# EAGLE board circuito_tesi (EAGLE 9.6.2)
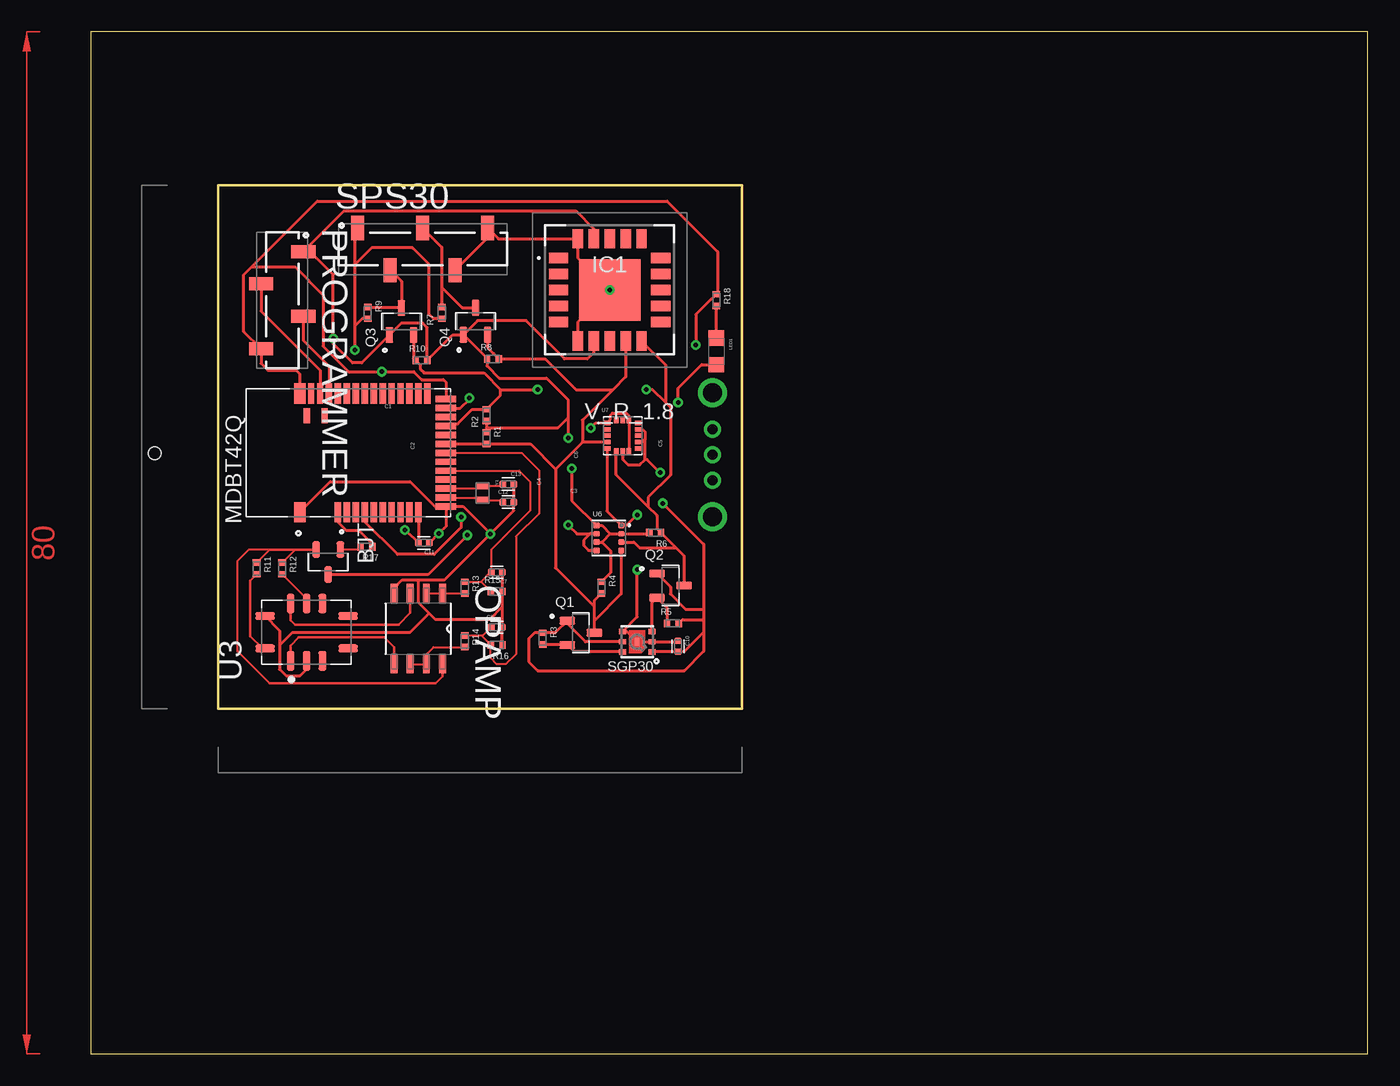
[diagram p0: board, top side]
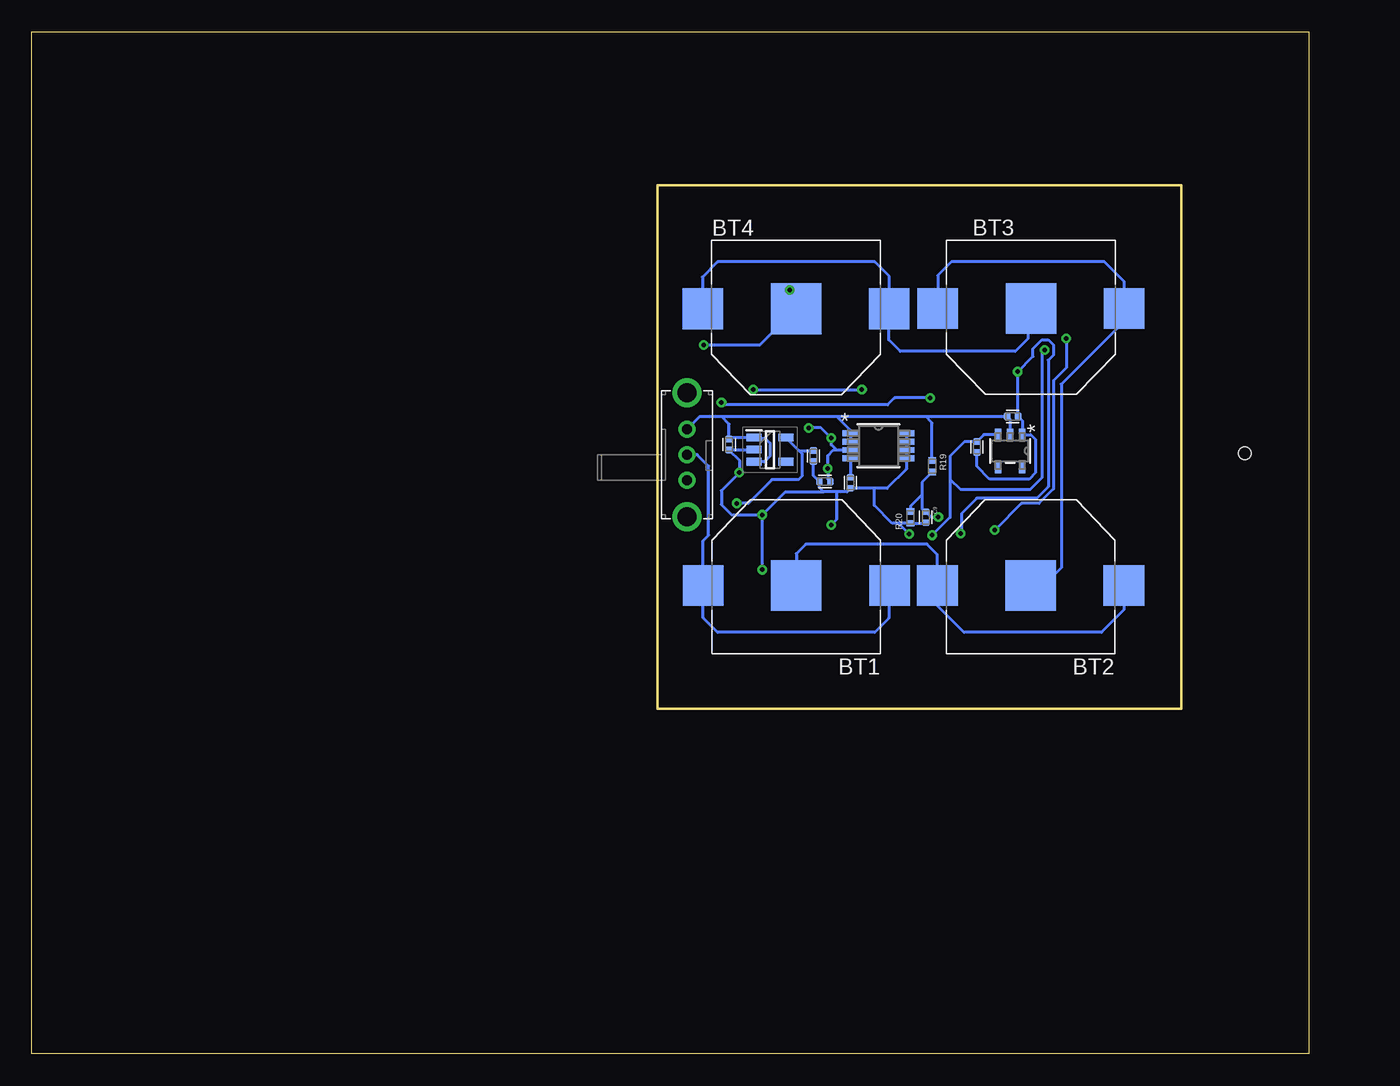
[diagram p1: board, bottom side, seen from below]

Size 100 x 80 mm. Coordinates in mm from the lower left corner, seen from the top.
Outline: 0,0 100,0 100,80 0,80 0,0
Outline: 10,68 10,27 51,27 51,68 10,68
Copper layers (1*16): Top 0.035mm / dielectric 1.5mm / Bottom 0.035mm
Design rules "default": minimum track width 6mil, minimum drill 0.35mm, track to track 6mil, track to pad 6mil, pad to pad 6mil, via to via 6mil, smd to smd 6mil, copper to edge 40mil, drill to drill 6mil, minimum pad ring 10mil, minimum via ring 8mil, stop-mask expansion 4mil, vias tented up to drill 0mil, thermal gap 10mil
Holes 1 mm at 5,47

## Footprints (pad centres in the part's own frame; a part is rotated, then mirrored left to right if it is on the bottom)
SOT95P230X110-3N = smd 1.26 x 0.59: 1 -0.98,0.95; 2 -0.98,-0.95; 3 0.98,0
BAT_2996TR = smd 3.96 x 3.96: - 0,0 | smd 3.18 x 3.18: S+1 -7.3,0; S+2 7.3,0
CAPC1005X55N = smd 0.54 x 0.6: 1 -0.43,0; 2 0.43,0
SCD41DR2 = smd 1.5 x 0.8: 1 -4,2.5; 2 -4,1.25; 3 -4,0; 4 -4,-1.25; 5 -4,-2.5; 11 4,-2.5; 12 4,-1.25; 13 4,0; 14 4,1.25; 15 4,2.5 | smd 0.8 x 1.5: 6 -2.5,-4; 7 -1.25,-4; 8 0,-4; 9 1.25,-4; 10 2.5,-4; 16 2.5,4; 17 1.25,4; 18 0,4; 19 -1.25,4; 20 -2.5,4 | smd 4.8 x 4.8: 21 0,0
DIOC200X125X110 = smd 1.2 x 1.2: + 1.05,0; - -1.05,0
XCVR_317030213 = smd 1.6 x 0.9: 1 -4.65,3.8; 39 4.65,3.8 | smd 1.6 x 0.5: 2 -4.65,0.8; 3 -4.65,0.1; 4 -4.65,-0.6; 5 -4.65,-1.3; 6 -4.65,-2; 7 -4.65,-2.7; 8 -4.65,-3.4; 9 -4.65,-4.1; 10 -4.65,-4.8; 11 -4.65,-5.5; 25 4.65,-6.2; 26 4.65,-5.5; 27 4.65,-4.8; 28 4.65,-4.1; 29 4.65,-3.4; 30 4.65,-2.7; 31 4.65,-2; 32 4.65,-1.3; 33 4.65,-0.6; 34 4.65,0.1; 35 4.65,0.8; 36 4.65,1.5; 37 4.65,2.2; 38 4.65,2.9 | smd 0.5 x 1.6: 12 -4.2,-7.65; 13 -3.5,-7.65; 14 -2.8,-7.65; 15 -2.1,-7.65; 16 -1.4,-7.65; 17 -0.7,-7.65; 18 0,-7.65; 19 0.7,-7.65; 20 1.4,-7.65; 21 2.1,-7.65; 22 2.8,-7.65; 23 3.5,-7.65; 24 4.2,-7.65 | smd 1.2 x 0.5: 40 2.9,3.25; 41 2.9,1.85
SOIC127P600X175-8N = smd 1.422 x 0.533: 1 -2.794,1.905; 2 -2.794,0.635; 3 -2.794,-0.635; 4 -2.794,-1.905; 5 2.794,-1.905; 6 2.794,-0.635; 7 2.794,0.635; 8 2.794,1.905
GCT_BG306-04-A-1-0400-X-X_REVD = smd 1.02 x 1.9: 1 -3.81,1.65; 2 -1.27,-1.65; 3 1.27,1.65; 4 3.81,-1.65
SOT95P240X111-3N = smd 1.23 x 0.6: 1 -1.06,0.95; 2 -1.06,-0.95; 3 1.06,0
RESC1005X35N = smd 0.49 x 0.6: 1 -0.457,0; 2 0.457,0
SW_EG1213 = drill 0.8: 1 -2,0; 2 0,0; 3 2,0 | drill 1.5: P$4 -4.85,0; P$5 4.85,0
SGP30 = smd 0.55 x 0.4: 1 -1.15,0.8; 2 -1.15,0; 3 -1.15,-0.8; 4 1.15,-0.8; 5 1.15,0; 6 1.15,0.8 | smd 0.305 x 0.61: DIEPAD 0,0
GCT_BG306-05-A-1-0400-X-X_REVD = smd 1.02 x 1.9: 1 -5.08,1.65; 2 -2.54,-1.65; 3 0,1.65; 4 2.54,-1.65; 5 5.08,1.65
SENSOR_MICS-6814 = smd 1.5 x 0.6: A -2.25,1.25; B -2.25,0; C -2.25,-1.25; F 2.25,-1.25; G 2.25,0; H 2.25,1.25 | smd 0.6 x 1.5: D -1.27,-3.25; E 1.27,-3.25; J 1.27,3.25; K -1.27,3.25
PSON65P250X250X100-8N = smd 0.49 x 0.45: 1 0.97,0.975; 2 0.97,0.325; 3 0.97,-0.325; 4 0.97,-0.975; 5 -0.97,-0.975; 6 -0.97,-0.325; 7 -0.97,0.325; 8 -0.97,0.975
PQFN50P300X300X100-16N = smd 0.52 x 0.35: 1 -1.225,1; 2 -1.225,0.5; 3 -1.225,0; 4 -1.225,-0.5; 5 -1.225,-1; 9 1.225,-1; 10 1.225,-0.5; 11 1.225,0; 12 1.225,0.5; 13 1.225,1 | smd 0.35 x 0.52: 6 -0.5,-1.225; 7 0,-1.225; 8 0.5,-1.225; 14 0.5,1.225; 15 0,1.225; 16 -0.5,1.225
SOT95P275X130-5N = smd 1.2 x 0.6: 1 -1.25,0.95; 2 -1.25,0; 3 -1.25,-0.95; 4 1.25,-0.95; 5 1.25,0.95
MSOP-8LD-PL-1_MCH = smd 1.257 x 0.457: 1 -2.178,0.975; 2 -2.178,0.325; 3 -2.178,-0.325; 4 -2.178,-0.975; 5 2.178,-0.975; 6 2.178,-0.325; 7 2.178,0.325; 8 2.178,0.975
TSOT23-5_ONS = smd 0.953 x 0.508: 1 -1.276,0.95; 2 -1.276,0; 3 -1.276,-0.95; 4 1.276,-0.95; 5 1.276,0.95
XTAL_ECS-.327-9-16-TR = smd 0.5 x 1: 1 -0.55,0; 2 0.55,0

## Placement (x,y rotation side)
BJT  MMBT3904-215  [SOT95P230X110-3N]  18.6,38.5 270 top
BT1  2996TR  [BAT_2996TR]  40.14,36.65 180 bottom
BT2  2996TR  [BAT_2996TR]  21.79,36.65 180 bottom
BT3  2996TR  [BAT_2996TR]  21.76,58.35 0 bottom
BT4  2996TR  [BAT_2996TR]  40.16,58.33 0 bottom
C1  C0402H102J5GACTU  [CAPC1005X55N]  23.2,49.9 0 bottom
C2  C0402H102J5GACTU  [CAPC1005X55N]  26,47.5 270 bottom
C3  C0402H102J5GACTU  [CAPC1005X55N]  37.9,44.8 180 bottom
C4  C0402H102J5GACTU  [CAPC1005X55N]  35.9,44.7 270 bottom
C5  C0402H102J5GACTU  [CAPC1005X55N]  45.4,47.7 270 bottom
C6  C0402H102J5GACTU  [CAPC1005X55N]  38.8,46.8 270 bottom
C7  C0402H102J5GACTU  [CAPC1005X55N]  31.8,37.7 180 top
C8  C0402H102J5GACTU  [CAPC1005X55N]  31.8,33.4 0 top
C9  C0402H102J5GACTU  [CAPC1005X55N]  30,42 270 bottom
C10  C0402H102J5GACTU  [CAPC1005X55N]  46,31.9 270 top
C11  C0402H102J5GACTU  [CAPC1005X55N]  26.1,40 180 top
C12  C0402H102J5GACTU  [CAPC1005X55N]  32.7,43.2 0 top
C13  C0402H102J5GACTU  [CAPC1005X55N]  32.7,44.6 0 top
IC1  SCD41-D-R2  [SCD41DR2]  40.65,59.8 0 top
LED1  LTST-C170TBKT  [DIOC200X125X110]  49,55 270 top
MDBT42Q  317030213  [XCVR_317030213]  20.17,47.05 90 top
OPAMP  TSV912IDT  [SOIC127P600X175-8N]  25.66,33.28 270 top
PROGRAMMER  BG306-04-A-1-0400-X-X_REVD  [GCT_BG306-04-A-1-0400-X-X_REVD]  15,59 270 top
Q1  BSS138  [SOT95P240X111-3N]  38.39,32.96 0 top
Q2  BSS138  [SOT95P240X111-3N]  45.41,36.66 0 top
Q3  BSS138  [SOT95P240X111-3N]  24.34,57.33 90 top
Q4  BSS138  [SOT95P240X111-3N]  30.14,57.35 90 top
R1  8-1879333-9  [RESC1005X35N]  31,48.2 270 top
R2  8-1879333-9  [RESC1005X35N]  31,50 90 top
R3  8-1879333-9  [RESC1005X35N]  35.4,32.5 270 top
R4  8-1879333-9  [RESC1005X35N]  40,36.5 270 top
R5  8-1879333-9  [RESC1005X35N]  45.6,33.7 0 top
R6  8-1879333-9  [RESC1005X35N]  44.2,40.8 180 top
R7  8-1879333-9  [RESC1005X35N]  27.5,58 90 top
R8  8-1879333-9  [RESC1005X35N]  31.5,54.4 0 top
R9  8-1879333-9  [RESC1005X35N]  21.7,58 270 top
R10  8-1879333-9  [RESC1005X35N]  25.9,54.3 0 top
R11  8-1879333-9  [RESC1005X35N]  13,38 270 top
R12  8-1879333-9  [RESC1005X35N]  15,38 270 top
R13  8-1879333-9  [RESC1005X35N]  29.3,36.5 270 top
R14  8-1879333-9  [RESC1005X35N]  29.3,32.3 270 top
R15  8-1879333-9  [RESC1005X35N]  31.8,36.2 0 top
R16  8-1879333-9  [RESC1005X35N]  31.8,32 180 top
R17  8-1879333-9  [RESC1005X35N]  21.6,39.7 180 top
R18  8-1879333-9  [RESC1005X35N]  49,59 270 top
R19  8-1879333-9  [RESC1005X35N]  29.5,46 270 bottom
R20  8-1879333-9  [RESC1005X35N]  31.2,42 90 bottom
S1  EG1213  [SW_EG1213]  48.7,46.9 270 bottom
SGP30  SGP30  [SGP30]  42.8,32.26 180 top
SPS30  BG306-05-A-1-0400-X-X_REVD  [GCT_BG306-05-A-1-0400-X-X_REVD]  26,63 0 top
U3  MICS-6814  [SENSOR_MICS-6814]  16.91,33.01 90 top
U6  BME280  [PSON65P250X250X100-8N]  40.58,40.39 0 top
U7  LIS3DH  [PQFN50P300X300X100-16N]  41.66,48.39 0 top
V_R_1.8  S-1318D18-M5T1U4  [SOT95P275X130-5N]  42.2,47.3 0 bottom
V_R_3.3  MIC5219-3.3YMMMSOP-8LD-PL-1_MCH  [MSOP-8LD-PL-1_MCH]  33.7,47.6 0 bottom
V_R_5  MC78LC50NTRGTSOT23-5_ONS  [TSOT23-5_ONS]  23.4,47.2 270 bottom
Y1  ECS-.327-9-16-TR  [XTAL_ECS-.327-9-16-TR]  30.7,43.9 270 top

## Library data of the parts
BJT = BJT_TO-236; DESCRIPTION: Bipolar (BJT) Transistor NPN 40 V 200 mA 300MHz 250 mW Surface Mount TO-236AB; DIGI-KEY_PART_NUMBER: 1727-4044-2-ND; MF: Nexperia USA; MP: MMBT3904,215; PACKAGE: SOT23-3 Nexperia USA Inc.; PURCHASE-URL: https://pricing.snapeda.com/search/part/MMBT3904,215/?ref=eda
BT1-BT4 = Battery_holder; DESCRIPTION: SMT Holder for 11.6mm Cell-Tin Nickel Plated on T&R; DIGI-KEY_PART_NUMBER: 36-2996TR-ND; MF: Keystone Electronics; MP: 2996TR; PACKAGE: None; PURCHASE-URL: https://pricing.snapeda.com/search/part/2996TR/?ref=eda
C1-C13 = Condensatore_case_0402; AVAILABILITY: Not in stock; DESCRIPTION: CAPACITOR, NP0, 0402, 50V, 1NF; Capacitance:1000pF; Capacitance Tolerance:± 5%; Dielectric Characteristic:C0G / NP0; Voltage Rating:50V; Capacitor Case Style:0402; Operating Temperature Range:-55°C to +200°C; SVHC:No SVHC (19-Dec-2011); Capacitor Mounting:SMD; MF: KEMET; MP: C0402H102J5GACTU; PACKAGE: 0402 KEMET; PRICE: None
IC1 = SCD41-R2_unofficial; ARROW_PART_NUMBER: SCD41-D-R2; ARROW_PRICE-STOCK: https://www.arrow.com/en/products/scd41-d-r2/sensirion-ag?region=nac; DESCRIPTION: Air Quality Sensor CO2 Sensor 2.5V/3.3V/5V 20-Pin SMD EP; HEIGHT: 6.8mm; MANUFACTURER_NAME: Sensirion; MANUFACTURER_PART_NUMBER: SCD41-D-R2; MOUSER_PART_NUMBER: 403-SCD41-D-R2; MOUSER_PRICE-STOCK: https://www.mouser.co.uk/ProductDetail/Sensirion/SCD41-D-R2?qs=HBWAp0VN4Ri4o7ei4T3s0g%3D%3D
LED1 = LED_0805; DESCRIPTION: LED Low-Power Uni-Color Blue 468nm 2-Pin Chip LED T/R; MF: Lite-On Electronics; MP: LTST-C170TBKT; PACKAGE: None; PURCHASE-URL: https://pricing.snapeda.com/search/part/LTST-C170TBKT/?ref=eda
MDBT42Q = Raytac_nRF52; DESCRIPTION: Bluetooth Bluetooth v4.2 Transceiver Module 2.4GHz Integrated, Chip Surface Mount; DIGI-KEY_PART_NUMBER: 1597-1434-ND; MF: Seeed Technology; MP: 317030213; PACKAGE: SMD-41 Seeed Studio; PURCHASE-URL: https://pricing.snapeda.com/search/part/317030213/?ref=eda
OPAMP = Opamp_SMD; AVAILABILITY: In Stock; DESCRIPTION: General Purpose Amplifier 2 Circuit Rail-to-Rail 8-SOIC; MF: STMicroelectronics; MP: TSV912IDT; PACKAGE: SOIC-8 STMicroelectronics; PRICE: None; PURCHASE-URL: https://pricing.snapeda.com/search/part/TSV912IDT/?ref=eda
PROGRAMMER = Connet_6_BG306-04-A-1-0400-X-X_REVD; DESCRIPTION: 4 Position Receptacle Connector 0.100 (2.54mm) Surface Mount Gold; DIGI-KEY_PART_NUMBER: 2073-BG306-04-A-1-0400-L-BTR-ND; MF: Global Connector Technology; MP: BG306-04-A-1-0400-L-B; PACKAGE: None; PURCHASE-URL: https://pricing.snapeda.com/search/part/BG306-04-A-1-0400-L-B/?ref=eda
Q1-Q4 = BSS138; DESCRIPTION: N-Channel 50 V 200mA (Ta) 225mW (Ta) Surface Mount SOT-23-3 (TO-236); DIGI-KEY_PART_NUMBER: BSS138TR-ND; MF: ON Semiconductor; MP: BSS138; PACKAGE: SOT-23 ON; PURCHASE-URL: https://pricing.snapeda.com/search/part/BSS138/?ref=eda
R1-R20 = Resistenza_case_0402; AVAILABILITY: In Stock; COMMENT: 8-1879333-9; DESCRIPTION: Precision Thin Film Smnt Resistor 0402 Case 160kOhm +/-0.1%.063W +/-25ppm/C; MF: TE Connectivity; MP: 8-1879333-9; PACKAGE: None; PRICE: None; PURCHASE-URL: https://pricing.snapeda.com/search/part/8-1879333-9/?ref=eda
S1 = switch_TH_HO; DESCRIPTION: Slide Switch SPDT Through Hole, Right Angle; DIGI-KEY_PART_NUMBER: EG1906-ND; MF: E-Switch; MP: EG1213; PACKAGE: None; PURCHASE-URL: https://pricing.snapeda.com/search/part/EG1213/?ref=eda
SGP30 = SGP30; AVAILABILITY: In Stock; DESCRIPTION: SGP30, SHTC1 Air Quality, Humidity, Temperature Sensor Arduino Platform Evaluation Expansion Board; MF: Sensirion AG; MP: SGP30; PACKAGE: None; PRICE: None; PURCHASE-URL: https://pricing.snapeda.com/search/part/SGP30/?ref=eda
SPS30 = Connet_5_BG306-05-A-1-0400-X-X_REVD; DESCRIPTION: 5 Position Receptacle Connector 0.100 (2.54mm) Surface Mount Gold; DIGI-KEY_PART_NUMBER: 2073-BG306-05-A-1-0400-L-BTR-ND; MF: Global Connector Technology; MP: BG306-05-A-1-0400-L-B; PACKAGE: None; PURCHASE-URL: https://pricing.snapeda.com/search/part/BG306-05-A-1-0400-L-B/?ref=eda
U3 = MICS-6814; AVAILABILITY: Not in stock; DESCRIPTION: MiCS-6814 Air Quality Sensor mikroBUS™ Click™ Platform Evaluation Expansion Board; MF: MikroElektronika; MP: MICS-6814; PACKAGE: None; PRICE: None
U6 = BME280; AVAILABILITY: In Stock; DESCRIPTION: Board Mount Humidity Sensors MEMS humidity, pressure and temperature sensor; MF: Bosch; MP: BME280; PACKAGE: LGA-8 Bosch; PRICE: None; PURCHASE-URL: https://pricing.snapeda.com/search/part/BME280/?ref=eda
U7 = LIS3DH; DESCRIPTION: Accelerometer X, Y, Z Axis ±2g, 4g, 8g, 16g 0.5Hz ~ 625Hz 16-LGA (3x3); DIGI-KEY_PART_NUMBER: 497-10610-ND; MF: STMicroelectronics; MP: LIS3DH; PACKAGE: LGA-16 STMicroelectronics; PURCHASE-URL: https://pricing.snapeda.com/search/part/LIS3DH/?ref=eda
V_R_1.8 = VOLT_REG_1.8_SOT-23-5; DESCRIPTION: IC REG LINEAR 1.8V 100MA SOT23-5; HEIGHT: 1.3mm; MANUFACTURER_NAME: ABLIC Inc.; MANUFACTURER_PART_NUMBER: S-1318D18-M5T1U4; MOUSER_PART_NUMBER: 628-S-1318D18-M5T1U4; MOUSER_PRICE-STOCK: https://www.mouser.co.uk/ProductDetail/ABLIC/S-1318D18-M5T1U4/?qs=bZr6mbWTK5mVILZBDijY2w%3D%3D
V_R_3.3 = Volt_Reg_3.3_8MSOP; COPYRIGHT: Copyright (C) 2022 Ultra Librarian. All rights reserved.; DIGI-KEY_PART_NUMBER_1: 576-1827-5-ND; MANUFACTURER_PART_NUMBER: MIC5219-3.3YMM; MFR_NAME: Microchip
V_R_5 = VOLT_REG_5V_SOT-23-5; COPYRIGHT: Copyright (C) 2022 Ultra Librarian. All rights reserved.; DIGI-KEY_PART_NUMBER_1: 2156-MC78LC50NTRG-OS-ND; DIGI-KEY_PART_NUMBER_2: =MC78LC50NTRG; DIGI-KEY_PART_NUMBER_3: MC78LC50NTRGOSCT-ND; DIGI-KEY_PART_NUMBER_4: MC78LC50NTRGOSDKR-ND; DIGI-KEY_PART_NUMBER_5: MC78LC50NTRGOSTR-ND; MANUFACTURER_PART_NUMBER: MC78LC50NTRG; MFR_NAME: onsemi
Y1 = Crystal-ECS-.327-9-16-TR; DESCRIPTION: 32.768 kHz ±20ppm Crystal 9pF 90 kOhms 2-SMD, No Lead; DIGI-KEY_PART_NUMBER: XC2132TR-ND; MF: ECS Inc.; MP: ECS-.327-9-16-TR; PACKAGE: SMD-2 ECS International; PURCHASE-URL: https://pricing.snapeda.com/search/part/ECS-.327-9-16-TR/?ref=eda

## Nets
1.8V: C6.1 C10.2 Q1.1 Q2.1 R3.1 R5.2 SGP30.1 SGP30.5 V_R_1.8.5
3.3V: C3.1 C11.2 IC1.7 IC1.19 MDBT42Q.11 PROGRAMMER.1 Q3.1 Q4.1 R1.1 R2.1 R4.1 R6.2 R8.1 R10.2 U6.2 U6.6 U6.8 U7.1 U7.8 U7.14 V_R_3.3.3
5V: BJT.3 C2.1 R7.1 R9.2 SPS30.1 V_R_5.3
AIN1: C7.2 MDBT42Q.16 R13.1 R15.1
AIN3: C8.1 MDBT42Q.18 R14.1 R16.2
AIN4: C9.1 MDBT42Q.5 R19.2 R20.2
BJT: BJT.2 OPAMP.8 R11.1 R12.1
DCC: MDBT42Q.10
DEC4: MDBT42Q.9
GND: BT4.- C1.2 C2.2 C3.2 C4.2 C5.2 C6.2 C7.1 C8.2 C9.2 C10.1 C11.1 C12.2 C13.2 IC1.6 IC1.20 IC1.21 MDBT42Q.1 MDBT42Q.12 MDBT42Q.24 MDBT42Q.39 OPAMP.4 PROGRAMMER.4 R15.2 R16.1 R18.1 R20.1 SGP30.2 SGP30.4 SGP30.DIEPAD SPS30.4 SPS30.5 U3.B U3.J U6.1 U6.5 U6.7 U7.5 U7.7 U7.10 U7.12 V_R_1.8.2 V_R_3.3.5 V_R_3.3.6 V_R_3.3.7 V_R_3.3.8 V_R_5.1
LED: LED1.+ MDBT42Q.23
N$2: BT1.- BT2.S+1 BT2.S+2
N$4: BT2.- BT3.S+1 BT3.S+2
N$6: OPAMP.5 U3.A
N$7: OPAMP.6 OPAMP.7 R14.2
N$8: OPAMP.1 OPAMP.2 R13.2
N$9: LED1.- R18.2
N$10: OPAMP.3 U3.H
N$11: R12.2 U3.G
N$13: R11.2 U3.K
N$14: C4.1 V_R_3.3.4
N$15: BJT.1 R17.2
N$17: C12.1 MDBT42Q.13 Y1.2
N$18: C13.1 MDBT42Q.14 Y1.1
N$25: BT3.- BT4.S+1 BT4.S+2
N$27: BT1.S+1 BT1.S+2 S1.2
P8: MDBT42Q.2 R17.1
SCL: IC1.9 MDBT42Q.19 Q1.3 Q4.2 R1.2 R4.2 R8.2 U6.4 U7.4
SCL5: Q4.3 R7.2 SPS30.3
SCL18: Q1.2 R3.2 SGP30.6
SDA: IC1.10 MDBT42Q.21 Q2.3 Q3.2 R2.2 R6.1 R10.1 U6.3 U7.6
SDA5: Q3.3 R9.1 SPS30.2
SDA18: Q2.2 R5.1 SGP30.3
SWDCLK: MDBT42Q.36 PROGRAMMER.3
SWDIO: MDBT42Q.37 PROGRAMMER.2
VDD: C1.1 C5.1 R19.1 S1.1 V_R_1.8.1 V_R_1.8.3 V_R_3.3.1 V_R_3.3.2 V_R_5.2

## Tracks (layer width: path | path; a pad name or v marks a point on that pad's centre or on a via)
1.8V  (via drill 0.35)
  Top 0.254: v44.8,43.1 48,39.9 48,34.8 | 48,34.8 48,34 | 48,34 48,33 | 48,33 46.47,31.47 C10.2 SGP30.1 | SGP30.5 38.74,32.26 37.33,33.67 Q1.1 36.38,32.96 R3.1 34.76,32.96 34.3,32.5 34.3,30.7 35,30 46.5,30 48,31.5 48,33 | Q2.1 45.4,36.56 45.4,36 46.6,34.8 48,34.8 | R5.2 46.36,34 48,34
  Bottom 0.254: V_R_1.8.5 39.93,47.23 | 39.93,47.23 C6.1 | 39.93,47.23 39.7,47 39.7,45.2 39.95,44.95 42.05,44.95 43.9,43.1 v44.8,43.1
3.3V  (via drill 0.35)
  Top 0.254: v37.67,45.83 37.67,43.3 U6.8 40.03,41.37 40.69,40.72 | 40.69,40.72 U6.2 43.66,40.72 R6.2 | U6.6 40.03,40.06 | 40.69,40.72 40.03,40.06 | 39.94,36.9 R4.1 40.7,37.66 40.7,39.4 40.03,40.06 | U7.8 U7.14 42.16,49.95 41.95,50.15 40.87,50.15 40.71,49.99 40.71,49.66 U7.1 39.56,49.39 v39.17,49 | MDBT42Q.11 C11.2 24.67,41 v24.6,41 | R2.1 31,49 | 31,49 R1.1 | Q4.1 31.04,54.44 R8.1 31.04,53.86 32,52.9 35.7,52.9 37.4,51.2 37.4,49.8 | Q4.1 28.35,56.29 R10.2 26.36,56.84 26,57.2 24.32,57.2 Q3.1 21.22,54.1 20.5,54.1 19,55.6 v19,56 19,61 17.19,62.81 PROGRAMMER.1 19.84,66 38,66 39.4,64.6 IC1.19 | IC1.7 39.4,54.9 38.9,54.4 37.1,54.4 34.1,57.4 30.3,57.4 Q4.1 | 31,49 36.6,49 37.4,49.8 | 37.4,49.8 v37.4,48.2
  Bottom 0.254: 37,47.27 37.23,47.27 37.67,46.83 v37.67,45.83 37.67,45 C3.1 | 37,47.27 V_R_3.3.3 | 37,47.27 37.4,47.67 v37.4,48.2 38.2,49 v39.17,49 | v24.6,41 22.51,43.09 21.13,43.09 19.99,44.23 19.99,52.71 19,53.7 v19,56
5V  (via drill 0.35)
  Top 0.254: v29.5,40.6 26.42,37.52 BJT.3 | v20.7,55.1 20.7,57 | 20.7,57 20.7,61.8 | 20.7,61.8 20.7,64.43 SPS30.1 | R9.2 21.24,57.54 20.7,57 | R7.1 26.86,57.54 26.5,57.9 26.5,61.8 25.2,63.1 22,63.1 20.7,61.8
  Bottom 0.254: V_R_5.3 25.45,48.48 C2.1 26.97,47.93 28.1,46.8 28.1,45 | 28.1,45 28.1,42 v29.5,40.6 | 28.1,45 27.3,44.2 21.8,44.2 20.9,45.1 20.9,54.9 v20.7,55.1
AIN1
  Top 0.152: R13.1 30.56,36.96 | 30.56,36.96 31.34,37.73 C7.2 31.37,39.47 34.4,42.5 34.4,44.8 33.55,45.65 MDBT42Q.16 | R15.1 30.59,36.96 30.56,36.96
AIN3
  Top 0.152: 31.24,32.1 R16.2 | R14.1 30.6,32.76 | 30.6,32.76 30.73,32.76 C8.1 | R16.2 30.6,32.74 30.6,32.76 | MDBT42Q.18 33.75,47.05 35.1,45.7 35.1,42.3 33.3,40.5 33.3,31.3 32.5,30.5 31.8,30.5 31.3,31 31.3,31.96 R16.2
AIN4  (via drill 0.35)
  Top 0.254: v29.02,42.02 29.02,41.22 26.9,39.1 24.02,39.1 21.47,41.66 MDBT42Q.5
  Bottom 0.254: 30.3,43.76 30.3,42.73 C9.1 29.69,42.12 29.67,42.12 29.55,42 29.03,42 v29.02,42.02 | R20.2 31.2,42.86 30.3,43.76 | R19.2 30.3,44.74 30.3,43.76
BJT
  Top 0.152: 11.5,31.5 11.5,38.6 12.4,39.5 14.08,39.5 14.1,39.48
  Top 0.2: BJT.2 16.02,39.48 | 16.02,39.48 14.1,39.48 14.02,39.48 R11.1 | 11.5,31.5 14,29 27,29 27.57,29.57 OPAMP.8 | R12.1 16.02,39.48
GND  (via drill 0.35)
  Top 0.254: C10.1 45.93,32.26 SGP30.2 SGP30.DIEPAD 42,33.06 SGP30.4 42.8,34.21 v42.8,37.9 | 43.42,48.1 43.42,48.68 43.26,48.84 42.93,48.84 U7.12 | 43.42,48.1 43.26,47.94 42.93,47.94 U7.10 | U7.5 40.44,42.48 U6.1 41.97,41.37 v42.8,42.2 | U6.7 39.12,40.72 | 39.12,40.72 38.6,40.2 38.6,39.8 38.98,39.41 U6.5 | U7.7 41.66,46.54 42.1,46.1 43,46.1 43.42,46.52 | 43.42,46.52 43.42,48.1 | IC1.6 38.15,57.3 IC1.21 38.15,62.3 IC1.20 31.93,63.8 SPS30.5 31.08,63.89 SPS30.4 | U3.J 14.8,33.14 14.8,32 | 14.8,32 14.8,30.1 15.3,29.6 16.4,29.6 16.91,30.11 U3.B | MDBT42Q.12 27.82,41.29 v27.27,40.73 C11.1 | C7.1 32.23,36.23 R15.2 32.23,36.17 32.23,35 | 32.23,35 C8.2 32.23,32.03 R16.1 | OPAMP.4 23.75,36.45 24.4,37.1 25.7,37.1 | 25.7,37.1 27.7,37.1 v31.3,40.7 | v31.3,40.7 33.13,42.53 C12.2 C13.2 | MDBT42Q.12 29.15,42.85 v31.3,40.7 | MDBT42Q.39 16.37,53.23 16.1,53.5 13.9,53.5 13.35,54.05 PROGRAMMER.4 12,56.54 12,61 12.6,61.6 | MDBT42Q.1 18.77,44.8 25,44.8 27,42.8 27.77,42.8 MDBT42Q.12 | 12.6,61.6 16,61.6 18.2,59.4 18.2,55.4 20.2,53.4 v22.8,53.4 25.3,53.4 25.92,52.78 27.62,52.78 27.82,52.58 MDBT42Q.24 | 32.23,35 31.23,34 27,34 26.5,34.5 | 26.5,34.5 25.7,35.3 25.7,37.1 | v37.4,41.4 38.09,40.72 39.12,40.72 | 14.8,32 15.8,33 25,33 26.5,34.5 | 12.6,61.6 17.75,66.75 45.15,66.75 49.1,62.8 49.1,59.56 R18.1 48.61,59.07 48.58,59.07 47.4,57.88 v47.4,55.5 | v44.6,45.5 43.58,46.52 43.42,46.52
  Bottom 0.254: V_R_1.8.2 45.37,47.3 C5.2 44.6,46.47 v44.6,45.5 46,44.1 46,43 45.2,42.2 v42.8,42.2 | C6.2 38.8,45.27 C3.2 38.33,44.33 38,44 | 37,44 36.17,44 C4.2 34.03,44.27 | 37,44 38,44 | V_R_3.3.8 V_R_3.3.7 V_R_3.3.6 V_R_3.3.5 31.52,45.78 33.03,44.27 34.03,44.27 | C9.2 30.03,41.54 R20.1 32.14,41.54 | 34.03,44.27 34.03,42.93 32.64,41.54 32.14,41.54 | C2.2 26,46 25,45 21.9,45 21.4,45.5 21.4,48.1 21.78,48.48 V_R_5.1 22.45,49.58 C1.2 22.77,53.37 v22.8,53.4 21.6,54.6 21.6,55.2 20.9,55.9 20.4,55.9 20,55.5 20,54.7 20.4,54.3 20.4,44.4 21.3,43.5 26,43.5 27.2,42.3 27.2,40.7 27.23,40.7 v27.27,40.73 | 38,44 41,44 v42.8,42.2 | v42.8,37.9 v42.8,42.2 | v37.4,41.4 37,41.8 37,44 | v47.4,55.5 42.99,55.5 BT4.- 41,59.17 41,60 40.85,60 IC1.21 | v31.3,40.7 32.14,41.54
  other vias: 40.65,59.8
LED  (via drill 0.35)
  Top 0.254: MDBT42Q.23 28.95,50.55 29.7,51.3 v29.65,51.35 | v46,51 46,52.1 47.85,53.95 LED1.+
  Bottom 0.254: v29.65,51.35 32.45,51.35 33,50.8 45.9,50.8 46,50.9 v46,51
N$2
  Bottom 0.254: BT2.S+1 14.49,34.75 16.24,33 27,33 29.09,35.09 BT2.S+2 29.09,39.09 29.9,39.9 39.4,39.9 40.14,39.16 BT1.-
N$4
  Bottom 0.254: BT2.- 20.79,36.65 19.39,38.05 19.39,52.42 14.46,57.35 BT3.S+2 14.46,60.46 16,62 28,62 29.06,60.94 BT3.S+1
N$6
  Top 0.2: U3.A 15.66,31.96 16.3,32.6 23,32.6 23.75,31.84 OPAMP.5
N$7
  Top 0.152: 29.24,31.9 R14.2 26.84,31.84 26.3,31.3 OPAMP.7 OPAMP.6
N$8
  Top 0.152: OPAMP.2 OPAMP.1 29.27,36.07 R13.2
N$9
  Top 0.254: LED1.- R18.2
N$10
  Top 0.2: U3.H 15.66,33.94 16,33.6 24.1,33.6 25.02,34.52 OPAMP.3
N$11
  Top 0.2: R12.2 16.91,35.63 U3.G
N$13
  Top 0.2: R11.2 12.5,37.04 12.5,32.7 13.46,31.74 U3.K
N$14
  Bottom 0.254: V_R_3.3.4 35.9,46.6 C4.1
N$15
  Top 0.152: R17.2 20.92,39.48 BJT.1
N$17
  Top 0.152: MDBT42Q.13 30.5,43.55 Y1.2 32.12,43.35 C12.1
N$18
  Top 0.152: MDBT42Q.14 30.5,44.25 Y1.1 32.12,44.45 C13.1
N$25
  Bottom 0.254: BT3.- 22,58.11 22,56 23,55 32,55 32.9,55.9 32.9,58.29 BT4.S+2 32.86,60.86 34,62 46.3,62 47.5,60.8 47.5,58.37 BT4.S+1
N$27
  Bottom 0.254: BT1.S+1 32.9,36.59 32.9,34.1 34,33 46.3,33 47.44,34.14 BT1.S+2 47.44,40.16 47,40.6 47,46 47.9,46.9 S1.2
P8
  Top 0.254: MDBT42Q.2 19.37,41.63 20,41 21,41 22.06,39.94 R17.1
SCL
  Top 0.254: Q1.3 39.45,33.9 | 39.45,33.9 39.45,35 | 39.45,35 39.45,35.49 R4.2 | U6.4 41.55,36 39.45,33.9 | 39.45,35 36.4,38.05 36.4,45.78 | U7.4 38.51,47.89 | IC1.9 41.9,53 40.9,52 | Q4.2 31.09,55.29 31.57,54.82 31.57,54.79 R8.2 35.6,54.4 38,52 40.9,52 | MDBT42Q.19 R1.2 | R1.2 34.44,47.74 36.4,45.78 | 38.51,47.89 36.4,45.78 | 38.51,47.89 38.51,49.61 40.9,52 | 31.13,47.89 R1.2
SCL5
  Top 0.254: SPS30.3 27.5,63.15 27.5,60 | 27.5,60 R7.2 | 27.5,60 29.09,58.41 Q4.3
SCL18
  Top 0.254: R3.2 35.43,32.01 Q1.2 37.88,31.46 SGP30.6
SDA  (via drill 0.35)
  Top 0.254: 45.83,39.63 R6.1 44.36,41.1 44.36,42.16 44.35,42.15 43.66,42.84 | 45.83,39.63 46.47,38.99 Q2.3 | U6.3 42.53,40.06 43,39.6 45.8,39.6 45.83,39.63 | 43.66,42.84 43.66,43.56 45.4,45.3 45.4,50.6 45,51 | U7.6 41.16,45.34 43.66,42.84 | IC1.10 45,53.95 45,51 | Q3.2 25.29,54.45 R10.1 25.8,53.94 25.8,53.6 26.1,53.3 30.8,53.3 32.1,52 | 45,51 44,52 v43.5,52 | MDBT42Q.21 27.99,49.32 28.74,49.32 29.87,50.46 R2.2 32.1,51.56 32.1,52 | 32.1,52 v35,52
  Bottom 0.254: v43.5,52 v35,52
SDA5
  Top 0.254: SPS30.2 24.34,60.47 Q3.3 21.77,58.39 R9.1
SDA18
  Top 0.254: SGP30.3 43.95,35.31 Q2.2 45.14,34.92 R5.1
SWDCLK
  Top 0.254: PROGRAMMER.3 16.65,55.85 18.67,53.83 MDBT42Q.36
SWDIO
  Top 0.254: PROGRAMMER.2 13.35,58.15 17.97,53.53 MDBT42Q.37
VDD
  Bottom 0.254: S1.1 47.7,49.9 46,49.9 | 46,49.9 37,49.9 | 46,49.9 45.4,49.3 C5.1 45.28,48.25 V_R_1.8.1 43.4,48.2 42.6,48.2 42.2,47.8 42.2,46.8 42.65,46.35 V_R_1.8.3 | V_R_3.3.1 35.9,48.6 | 23.53,48.61 V_R_5.2 23.4,49.67 C1.1 30,49.9 | 37,49.9 30,49.9 | R19.1 29.5,49.4 30,49.9 | V_R_3.3.2 V_R_3.3.1 | V_R_3.3.1 35.88,48.78 37,49.9
(copper drawn outside any net)
  shapes: Top area x2